# Altium PCB 21STM32Camera.PcbDoc
Units mil, origin at the board's own origin, x right, y up, seen from the top; angles counter-clockwise.
Board outline 2575 x 1930 mil, 2 copper layers (Top Layer, Bottom Layer); 18 components, 21 nets, 140 pads, 28 vias.
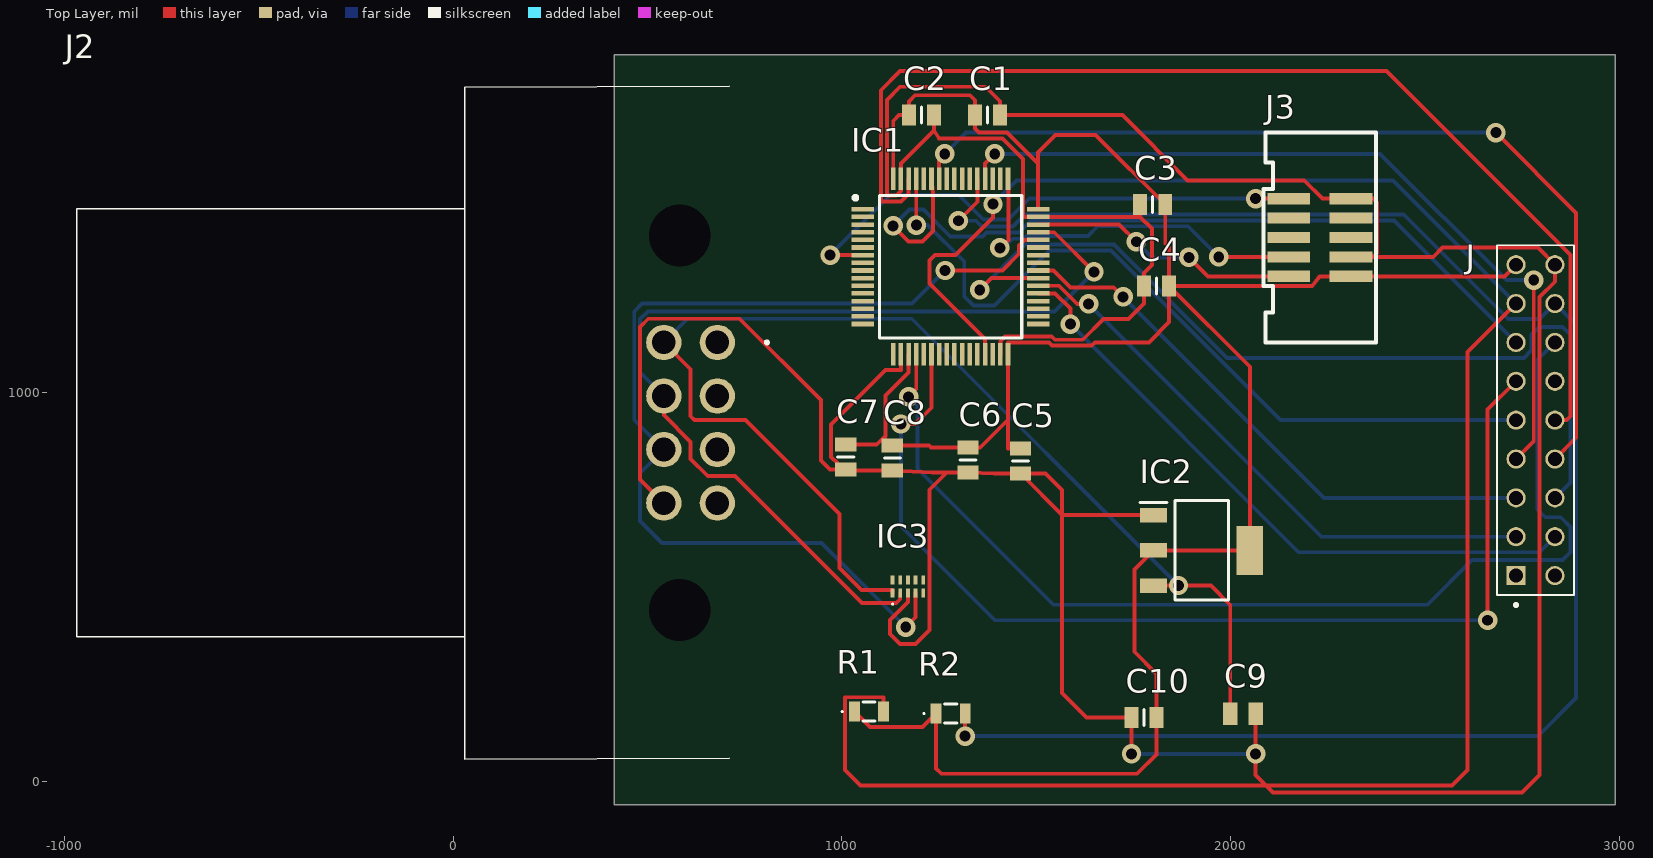
[diagram p0: Top Layer view]
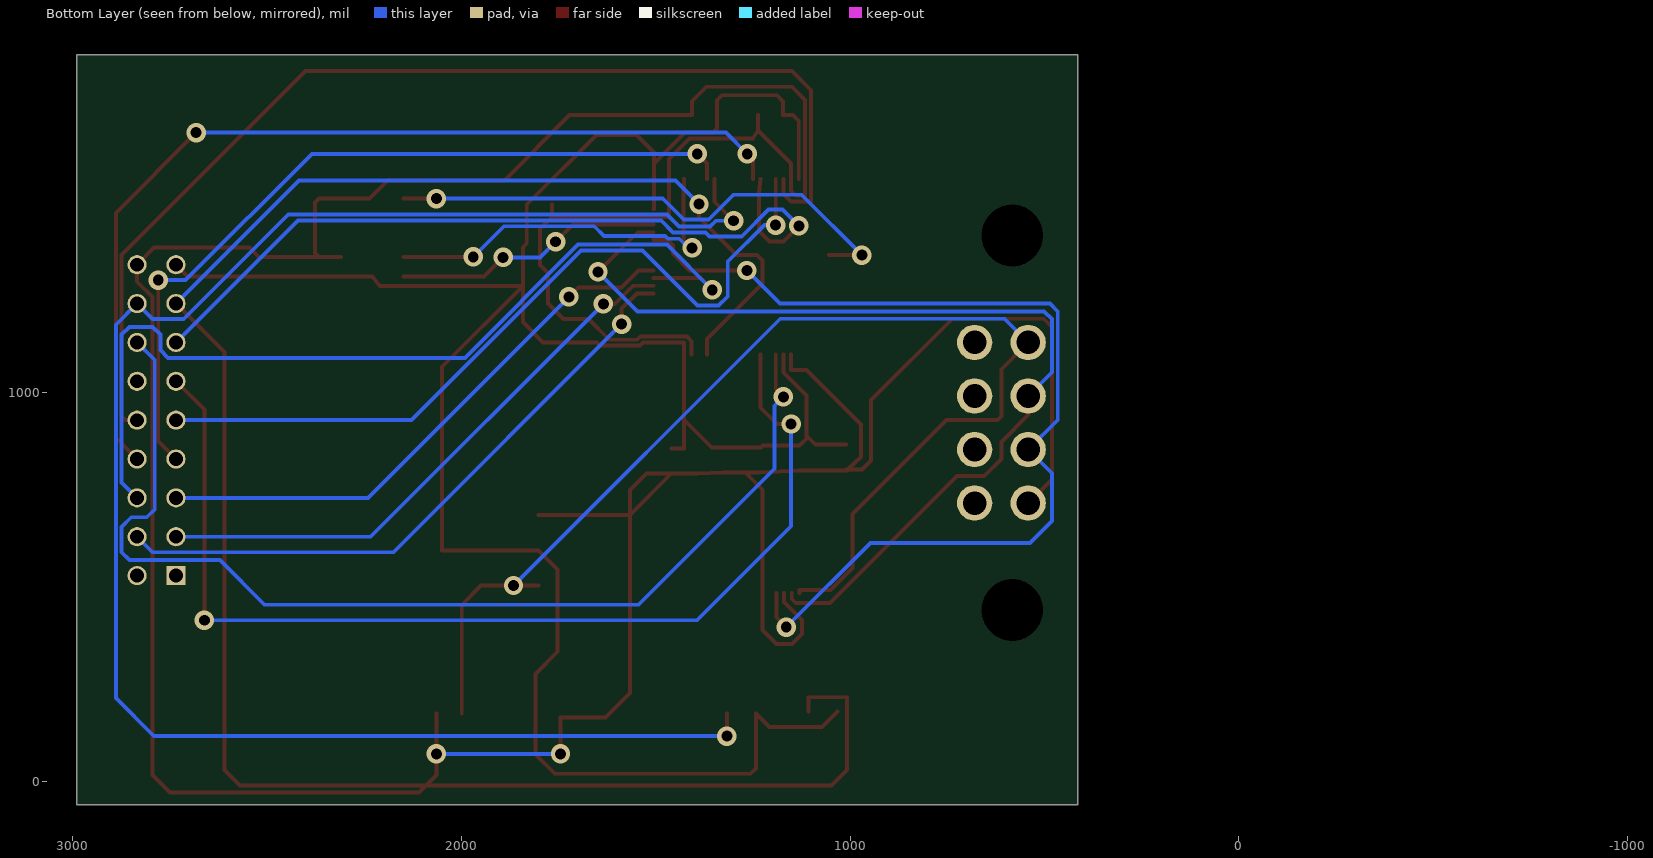
[diagram p1: Bottom Layer view, seen from below]

## Layer stack, top to bottom
Top Solder: solder mask 0.4, Solder Resist, Dk 3.5
Top Layer: signal copper 1.4
Dielectric 1: dielectric 12.6, FR-4, Dk 4.8
Bottom Layer: signal copper 1.4
Bottom Solder: solder mask 0.4, Solder Resist, Dk 3.5

## Board outline
415,-60 2990,-60 2990,1870 415,1870

## Design rules (kind name [scope] priority, off if disabled: settings)
Clearance [All] p1: gap=10 ignorepadtopadclearanceinfootprint=FALSE except(0: Arc-Hole Track-Hole SMDPad-Hole THPad-Hole Via-Hole Fill-Hole Poly-Hole Region-Hole Text-Hole; 5: Arc-Arc Arc-Track Arc-SMDPad Track-Track Track-SMDPad SMDPad-SMDPad)
PolygonConnect [All] p1: connectstyle=Relief reliefconductorwidth=10 reliefentries=4 polygonreliefangle="90 Angle" airgapwidth=10
RoutingVias [All] p1: holewidth=28 width=50 viastyle="Through Hole" minholewidth=28 minwidth=50 maxholewidth=28 maxwidth=50
SolderMaskExpansion [All] p1: expansion=4 istentingtop=FALSE
Width [All] p1: maxlimit=10 minlimit=10 preferedwidth=10
30 further rules are at their usual default settings.

## Components (designator, comment, footprint, x,y, rotation, side; value= is the part's Value field where it differs from the comment)
C1 "CL21B104KCFNNNE" CAPC2012X135N 1375,1715 r0 top
C2 "CL21B105KBFNNNE" CAPC2012X135N 1205,1715 r0 top
C3 "CL21B105KBFNNNE" CAPC2012X135N 1800,1485 r180 top
C4 "CL21B104KCFNNNE" CAPC2012X135N 1810,1275 r180 top
C5 "CL21B105KBFNNNE" CAPC2012X135N 1460,825 r270 top
C6 "CL21B104KCFNNNE" CAPC2012X135N 1325,827.28 r270 top
C7 "CL21B105KBFNNNE" CAPC2012X135N 1010,835 r270 top
C8 "CL21B104KCFNNNE" CAPC2012X135N 1130,832.28 r270 top
C9 "CL21A106KAYNNNE" CAPC2012X145N 2032.32,175 r0 top
C10 "CL21B104KCFNNNE" CAPC2012X135N 1777.72,165 r0 top
IC1 "STM32F446RCT6" QFP50P1200X1200X160-64N 1280,1325 r0 top
IC2 "LM1117MPX-3.3_NOPB" SOT230P700X180-4N 1925.98,595 r0 top
IC3 "PESD4USB5B-TBRX" PESD4USB5BTBRX 1170,501.73 r0 top
J "215309-9" TE_215309-9 2735,530 r90 top
J2 "34830-0801" 348300801 679.8,1130 r270 top
J3 "SHF-105-01-X-D-SM" SHF-105-01-X-D-SM 2230,1400 r90 top
R1 "0805W8F4701T5E" TNPV0805180KBEEA 1070,180 r0 top
R2 "0805W8F4701T5E" TNPV0805180KBEEA 1280,175 r0 top

## Footprints (in the part's own frame and the unit in brackets; to place one, negate y for a bottom-side part, rotate by r counter-clockwise, add the part's x,y. Pads: shape width x height; smd on the part's side, far side on the other; paste and mask are expansions set on the pad)
348300801 [mm]
  round 2.31 hole 1.54: 1(0,0) 2(3.5,0) 3(7,0) 4(10.5,0) 5(0,-3.5) 6(3.5,-3.5) 7(7,-3.5) 8(10.5,-3.5)
  round 2.025 hole 4.05 unplated: MH1(-7,-2.46) MH2(17.5,-2.46)
  silkscreen extent -16.75,-41.86 27.25,3.33, body extent -16.1,-41.56 26.59,1, height 25.37
CAPC2012X135N [mm]
  rect 0.91x1.39 smd: 1(-0.82,0) 2(0.82,0)
  silkscreen extent 0,-0.53 0,0.53, body extent -1,-0.63 1,0.63, height 1.35
CAPC2012X145N [mm]
  rect 0.97x1.47 smd: 1(-0.83,0) 2(0.83,0)
  body extent -1,-0.63 1,0.63, height 1.45
PESD4USB5BTBRX [mm]
  rect 0.25x0.6 smd: 1(-1,-0.425) 2(-0.5,-0.425) 3(0,-0.425) 4(0.5,-0.425) 5(1,-0.425) 6(1,0.425) 7(0.5,0.425) 8(0,0.425) 9(-0.5,0.425) 10(-1,0.425)
  silkscreen extent -1.05,-1.2 -0.95,-1.1, body extent -1.25,-0.5 1.25,0.5, height 0.9
QFP50P1200X1200X160-64N [mm]
  rect 1.475x0.3 smd: 1(-5.738,3.75) 2(-5.738,3.25) 3(-5.738,2.75) 4(-5.738,2.25) 5(-5.738,1.75) 6(-5.738,1.25) 7(-5.738,0.75) 8(-5.738,0.25) 9(-5.738,-0.25) 10(-5.738,-0.75) 11(-5.738,-1.25) 12(-5.738,-1.75) 13(-5.738,-2.25) 14(-5.738,-2.75) 15(-5.738,-3.25) 16(-5.738,-3.75) 33(5.738,-3.75) 34(5.738,-3.25) 35(5.738,-2.75) 36(5.738,-2.25) 37(5.738,-1.75) 38(5.738,-1.25) 39(5.738,-0.75) 40(5.738,-0.25) 41(5.738,0.25) 42(5.738,0.75) 43(5.738,1.25) 44(5.738,1.75) 45(5.738,2.25) 46(5.738,2.75) 47(5.738,3.25) 48(5.738,3.75)
  rect 0.3x1.475 smd: 17(-3.75,-5.738) 18(-3.25,-5.738) 19(-2.75,-5.738) 20(-2.25,-5.738) 21(-1.75,-5.738) 22(-1.25,-5.738) 23(-0.75,-5.738) 24(-0.25,-5.738) 25(0.25,-5.738) 26(0.75,-5.738) 27(1.25,-5.738) 28(1.75,-5.738) 29(2.25,-5.738) 30(2.75,-5.738) 31(3.25,-5.738) 32(3.75,-5.738) 49(3.75,5.738) 50(3.25,5.738) 51(2.75,5.738) 52(2.25,5.738) 53(1.75,5.738) 54(1.25,5.738) 55(0.75,5.738) 56(0.25,5.738) 57(-0.25,5.738) 58(-0.75,5.738) 59(-1.25,5.738) 60(-1.75,5.738) 61(-2.25,5.738) 62(-2.75,5.738) 63(-3.25,5.738) 64(-3.75,5.738)
  silkscreen extent -6.35,-4.65 4.65,4.65, body extent -6,-6 6,6, height 1.6
SHF-105-01-X-D-SM [mil]
  rect 29x110 smd mask+2: 1(-100,-80) 2(-100,80) 3(-50,-80) 4(-50,80) 5(0,-80) 6(0,80) 7(50,-80) 8(50,80) 9(100,-80) 10(100,80)
  silkscreen extent -270,-145 270,145
SOT230P700X180-4N [mm]
  rect 1.75x0.95 smd: 1(-3.15,2.3) 2(-3.15,0) 3(-3.15,-2.3)
  rect 1.75x3.2 smd: 4(3.15,0)
  silkscreen extent -4.02,-3.25 1.75,3.25, body extent -3.5,-3.25 3.5,3.25, height 1.68
TE_215309-9 [mm]
  rect 1.25x1.25 hole 0.9: 1(0,0)
  round 1.25 hole 0.9: 2(0,-2.54) 3(2.54,0) 4(2.54,-2.54) 5(5.08,0) 6(5.08,-2.54) 7(7.62,0) 8(7.62,-2.54) 9(10.16,0) 10(10.16,-2.54) 11(12.7,0) 12(12.7,-2.54) 13(15.24,0) 14(15.24,-2.54) 15(17.78,0) 16(17.78,-2.54) 17(20.32,0) 18(20.32,-2.54)
  silkscreen extent -2.02,-3.8 21.59,1.26
TNPV0805180KBEEA [mm]
  rect 0.7x1.3 smd: 1(-0.95,0) 2(0.95,0)
  silkscreen extent -1.8,-0.62 0.4,0.62, body extent -1,-0.63 1,0.63, height 0.55

## Part data
C1 C4 C6 C8 C10: "100uF", Manufacturer_Name="Samsung Electro-Mechanics", Mouser Part Number=187-CL21B104KCFNNNE, Arrow Part Number=CL21B104KCFNNNE, Arrow Price/Stock=https://www.arrow.com/en/products/cl21b104kcfnnne/samsung-electro-mechanics, Datasheet Link=https://datasheet.datasheetarchive.com/originals/distributors/DKDS-19/374389.pdf, Height=1.35mm, Manufacturer_Part_Number=CL21B104KCFNNNE, Mouser Price/Stock=https://www.mouser.co.uk/ProductDetail/Samsung-Electro-Mechanics/CL21B104KCFNNNE?qs=lptGheUA4EwiEGVRX9oguw%3D%3D
C2 C3 C5 C7: "1uF", Manufacturer_Name="Samsung Electro-Mechanics", Mouser Part Number=187-CL21B105KBFNNNE, Arrow Part Number=CL21B105KBFNNNE, Arrow Price/Stock=https://www.arrow.com/en/products/cl21b105kbfnnne/samsung-electro-mechanics?region=europe, Datasheet Link=https://componentsearchengine.com/Datasheets/2/CL21B105KBFNNNE.pdf, Height=1.35mm, Manufacturer_Part_Number=CL21B105KBFNNNE, Mouser Price/Stock=https://www.mouser.co.uk/ProductDetail/Samsung-Electro-Mechanics/CL21B105KBFNNNE?qs=yOVawPpwOwmddQEBPU6Y9A%3D%3D
C9: "10uF", Manufacturer_Name="Samsung Electro-Mechanics", Mouser Part Number=187-CL21A106KAYNNNE, Arrow Part Number=CL21A106KAYNNNE, Arrow Price/Stock=https://www.arrow.com/en/products/cl21a106kaynnne/samsung-electro-mechanics?region=nac, Datasheet Link=https://datasheet.datasheetarchive.com/originals/distributors/Datasheets_SAMA/6a45835c9b7400e9b49c55c38a8ff4a2.pdf, Height=1.45mm, Manufacturer_Part_Number=CL21A106KAYNNNE, Mouser Price/Stock=https://www.mouser.co.uk/ProductDetail/Samsung-Electro-Mechanics/CL21A106KAYNNNE?qs=yOVawPpwOwmTXAd4dJtNjA%3D%3D
IC1: "Integrated Circuit", Manufacturer_Name=STMicroelectronics, Mouser Part Number=511-STM32F446RCT6, Arrow Part Number=STM32F446RCT6, Arrow Price/Stock=https://www.arrow.com/en/products/stm32f446rct6/stmicroelectronics?region=nac, Datasheet Link=http://www.st.com/content/ccc/resource/technical/document/datasheet/65/cb/75/50/53/d6/48/24/DM00141306.pdf/files/DM00141306.pdf/jcr:content/translations/en.DM00141306.pdf, Height=1.6mm, Manufacturer_Part_Number=STM32F446RCT6, Mouser Price/Stock=https://www.mouser.co.uk/ProductDetail/STMicroelectronics/STM32F446RCT6?qs=Ok1pvOkw6%2FrlZ63GppV%2FkA%3D%3D
IC2: "Integrated Circuit", Arrow Part Number=LM1117MPX-3.3/NOPB, Manufacturer_Name="Texas Instruments", Mouser Part Number=926-LM1117MPX3.3NOPB, Arrow Price/Stock=https://www.arrow.com/en/products/lm1117mpx-3.3nopb/texas-instruments?region=nac, Datasheet Link=http://www.ti.com/lit/ds/symlink/lm1117.pdf, Height=1.8mm, Manufacturer_Part_Number=LM1117MPX-3.3/NOPB, Mouser Price/Stock=https://www.mouser.co.uk/ProductDetail/Texas-Instruments/LM1117MPX-3.3-NOPB?qs=X1J7HmVL2ZHRbBIxXi4utg%3D%3D
IC3: "Integrated Circuit", Manufacturer_Name=Nexperia, Mouser Part Number=771-PESD4USB5B-TBRX, Datasheet Link=https://assets.nexperia.com/documents/data-sheet/PESD4USB5B-TBS.pdf, Height=0.8mm, Manufacturer_Part_Number=PESD4USB5B-TBRX, Mouser Price/Stock=https://www.mouser.co.uk/ProductDetail/Nexperia/PESD4USB5B-TBRX?qs=MyNHzdoqoQL1Wz6R0ceOBw%3D%3D
J: "2X9P HV100 REC CON. TE, 8.5MM", Package=None, Availability=Unavailable, Centerline_Pitch="2.54 mm[.1 in]", EU_RoHS_Compliance=Compliant, MF="TE Connectivity", MP=215309-9, Number_of_Positions=9, Price=None, Product_Type=Connector, SnapEDA_Link=https://www.snapeda.com/parts/215309-9/TE%20Connectivity%20AMP%20Connectors/view-part/1389782/?ref=snap, TE_purchase_URL=https://www.te.com/usa-en/product-215309-9.html?te_bu=Cor&te_type=disp&te_campaign=seda_glo_cor-seda-global-disp-prtnr-fy19-seda-model-bom-cta_sma-317_1&elqCampaignId=32493
J2: "Connector", Manufacturer_Name=Molex, Mouser Part Number=538-34830-0801, Datasheet Link=https://www.mouser.com/datasheet/2/276/0348300801_PCB_HEADERS-693677.pdf, Height=25.88mm, Manufacturer_Part_Number=34830-0801, Mouser Price/Stock=https://www.mouser.co.uk/ProductDetail/Molex/34830-0801?qs=PdnAIJ6Mlf2HM0lerKt%252BjA%3D%3D
J3: "0.05\"X0.05\" SHROUDED TERMINAL STRIP, 10 PINS.", MANUFACTURER=SAMTEC, CREATED="February 17, 2015 - Wendy Xin", PCB DECAL=SHF-105-01-X-D-SM
R1 R2: library part TNPV0805180KBEEA, "4.7k", Manufacturer_Name=Vishay, Mouser Part Number=71-TNPV0805180KBEEA, Datasheet Link=https://www.vishay.com/docs/28881/tnpve3.pdf, Height=0.55mm, Manufacturer_Part_Number=TNPV0805180KBEEA, Mouser Price/Stock=https://www.mouser.co.uk/ProductDetail/Vishay/TNPV0805180KBEEA?qs=Li%252BoUPsLEnuke%2FRX4njE1w%3D%3D

## Via types
v1: diameter 50, hole 28, Top Layer to Bottom Layer, 28 vias

## Nets (pads, with @x,y where several pads share a name; then routed paths per layer and width w, separated by ;. In a path a pad name is that pad's centre, name@x,y a point inside that pad or via, vN(x,y) a via of type N, cw(c..) or ccw(c..) an arc to the next point about the centre after c; other vN are vias at no path point)
3.3V: C1.1 C2.1 C3.1 C4.1 C5.1 C6.1 C7.1 C8.1 C10.2 IC1.19 IC1.32 IC1.48 IC1.64 IC2.2 IC2.4 J3.1 J.17 R1.1 R2.1 | length 6488.9
  Top Layer w10: C7.1 1090,867.28 1108.64,885.93 ; R1.1 1072.6,140 1207.6,140 R2.1 1242.6,34 1256.6,20 1760,20 1810,70 C10.2 1810,277 1753,334 1753,546.03 IC2.2 IC2.4 2050,1067.28 C4.1 ; IC1.64 1132.36,1700 1147.36,1715 C2.1 1172.72,1750 1188.72,1766 1330,1766 1342.72,1753.28 C1.1 1342.72,1680 1352.72,1670 1425,1670 1505,1590 ; IC1.19 1171.73,1052.73 1112,993 1112,889.28 1108.64,885.93 ; C5.1 1427.64,857.28 1427.64,931 ; IC1.48 1505,1472.64 1505,1590 ; J.17 2705,1300 J3.1 2230,1300 2210,1275 C4.1 ; 1108.64,885.93 C8.1 1225,864.57 1230,859.57 C6.1 1356.21,859.57 1427.64,931 ; 1427.64,931 IC1.32 1427.64,1130 1533.1,1130 1541.1,1122 1643.1,1122 1651.1,1130 1790,1130 1842.28,1182.28 C4.1 ; 1505,1590 1505,1619 1550,1664 1653.28,1664 C3.1 1832.28,1385 1842.28,1375 C4.1
5V: C9.1 IC2.3 IC3.1 J2.5 | length 3144.3
  Top Layer w10: J2.5 611,1061 611,940 621.12,929.88 752.12,929.88 994,688 994,550 1051,493 1130.63,493 IC3.1 ; IC2.3 v1(1866.42,504.45) 1950,504.45 1999.64,454.8 C9.1
  Bottom Layer w10: J2.5 603,1191 1179.87,1191 v1(1866.42,504.45)
D0: IC1.37 J.4 | length 1645
  Top Layer w10: IC1.37 1549,1256.1 1588.1,1217 v1(1588.1,1177)
  Bottom Layer w10: v1(1588.1,1177) 2175.1,590 2795,590 J.4
D1: IC1.38 J.3 | length 1496.6
  Top Layer w10: IC1.38 1559,1275.79 1605.79,1229 v1(1635,1229)
  Bottom Layer w10: v1(1635,1229) 2234,630 J.3
D2: IC1.39 J.6 | length 2353.5
  Top Layer w10: v1(1355,1265) 1385.47,1295.47 IC1.39
  Bottom Layer w10: v1(1355,1265) 1471.67,1381.67 1700,1381.67 1991.67,1090 2755,1090 2775,1110 2775,1150 2795,1170 2854.61,1170 2874.61,1150 2874.61,769.61 J.6
D3: IC1.40 J.5 | length 1471.5
  Top Layer w10: IC1.40 1544.84,1315.16 1588.69,1271.31 1699.69,1271.31 v1(1724,1247)
  Bottom Layer w10: v1(1724,1247) 2241,730 J.5
D4: IC1.52 J.7 | length 2074.9
  Top Layer w10: IC1.52 1368.58,1590 v1(1393.58,1615) ; J.7 2780.39,875.39 v1(2780.39,1290.39)
  Bottom Layer w10: v1(1393.58,1615) 2385.39,1615 2710,1290.39 v1(2780.39,1290.39)
D5: IC1.58 J.8 | length 2459.1
  Top Layer w10: IC1.58 1250.47,1600.47 v1(1265,1615) ; v1(2683,1670) 2889.61,1463.39 2889.61,884.61 J.8
  Bottom Layer w10: v1(1265,1615) 1320,1670 v1(2683,1670)
D7: IC1.62 J.10 | length 2852.1
  Top Layer w10: IC1.62 1171.73,1512 1152.73,1493 1101,1493 1101,1779 1150,1828 2401.61,1828 2874.61,1355 2874.61,940 2864.61,930 J.10
D8: IC1.61 J.9 | length 2039.9
  Top Layer w10: IC1.61 1191.42,1432.58 v1(1192,1432)
  Bottom Layer w10: v1(1192,1432) 1221,1432 1315,1338 1315,1248.43 1338.43,1225 1393,1225 1534.67,1366.67 1692.33,1366.67 2129,930 J.9
D+: IC1.45 IC3.2 J2.6 | length 2530.1
  Top Layer w10: J2.6 542,943 611,874 611,830 655,786 725,786 1051.68,459.32 1140,459.32 1150.32,469.63 IC3.2 ; IC1.45 1546.73,1413.58 v1(1649,1311.31)
  Bottom Layer w10: J2.6 481,1053.2 481,1190 501,1210 1547.69,1210 v1(1649,1311.31)
D-: IC1.44 IC3.4 J2.7 | length 2620
  Top Layer w10: v1(1164.5,397.5) 1189.69,422.69 IC3.4 ; v1(1266,1315) 1413,1315 1456.26,1358.26 1456.26,1380.16 1470,1393.9 IC1.44
  Bottom Layer w10: v1(1164.5,397.5) 948,614 537,614 481,670 481,793.41 J2.7 466,930.41 466,1210 486,1230 1181,1230 v1(1266,1315)
GND: C1.2 C2.2 C3.2 C4.2 C5.2 C6.2 C7.2 C8.2 C9.2 C10.1 IC1.18 IC1.31 IC1.47 IC1.63 IC2.1 IC3.3 J2.8 J3.3 J3.9 J.18 | length 10792.5
  Top Layer w10: J2.8 481,777.61 481,1170 502,1191 737,1191 946.28,981.72 946.28,826.43 970,802.72 C7.2@1007.05,802.72 ; C7.2@1007,800 C7.2@1010,800 ; IC1.18 1152.05,1059.05 1112.05,1059.05 972,919 972,835 C7.2@1007.05,802.72 ; IC3.3 1170,462 1124,416 1124,380 1150,354 1190,354 1226,390 1226,751 1270,795 ; C2.2 1237.28,1675.24 ; IC1.31 1407.95,1132.95 1420,1145 1540.1,1145 1548.1,1137 1620.1,1137 1673.1,1190 1737.72,1190 1777.72,1230 C4.2 1777.72,1309 1798,1329.28 1798,1422.72 1767.72,1453 ; v1(1745.43,71) C10.1 1630,165 1567,228 1567,686.28 ; C3.2 1767.72,1453 ; IC2.1 1567.73,685.55 1567,686.28 ; C9.2 v1(2065,71) 2065,16.39 2110,-28.61 2750,-28.61 2795.39,16.78 2795.39,1246.41 2835,1286.01 J.18 2791,1374 2546,1374 2522,1350 2367,1350 ; J3.3 2367,1350 ; C7.2@1007.05,802.72 C7.2 C7.2@1010,800 ; C7.2@1007.05,802.72 1008.65,801.25 C7.2@1010,800 ; C7.2@1010,800 C8.2 1233,795 1270,795 ; 1237.28,1675.24 1250,1655 1413,1655 1466,1602 1466,1452.95 IC1.47 1767.67,1452.95 1767.72,1453 ; 1237.28,1675.24 1152.05,1590 IC1.63 1152.05,1520 1140.05,1508 1116,1508 1116,1754 1150,1788 1370,1788 1407.28,1750.72 C1.2 1722,1715 1890,1547 2190,1547 2237,1500 J3.9 2367,1500 2377,1490 2377,1360 2367,1350 ; 1270,795 C6.2 1393.28,792.72 C5.2 C5.2@1460.57,792.72 ; C5.2@1460.57,792.72 1524.28,792.72 1567,750 1567,686.28 ; C5.2@1460.57,792.72 1567,686.28
  Bottom Layer w10: v1(1745.43,71) v1(2065,71)
HSYNC: IC1.20 J.14 | length 2809.6
  Top Layer w10: v1(1172,990) 1191.42,1009.42 IC1.20
  Bottom Layer w10: v1(1172,990) 1195,967 1195,805 1545,455 2507.13,455 2622.13,570 2854.61,570 2874.61,590 2874.61,655.39 2850,680 2810,680 2789.61,700.39 2789.61,1084.61 J.14
I2C2_SCL: IC1.29 J.15 R1.2 | length 5257.4
  Top Layer w10: R1.2 1107.4,217 1008,217 1008,30 1048,-10 2570,-10 2610,30 2610,1105 J.15 ; IC1.29 1368.58,1139 1226,1281.58 1226,1341 1240,1355 1293,1355 1389,1451 v1(1389,1486)
  Bottom Layer w10: v1(1389,1486) 1450,1547 2418,1547 J.15
I2C2_SDA: IC1.53 J.16 R2.2 | length 4518.6
  Top Layer w10: v1(1300,1443) 1348.9,1491.9 IC1.53 ; v1(1317.4,117) R2.2
  Bottom Layer w10: v1(1300,1443) 1345.79,1443 1360.5,1428.28 1440.52,1428.28 1471.23,1459 2446,1459 2715,1190 2795,1190 J.16 2889.61,1175.39 2889.61,214.61 2792,117 v1(1317.4,117)
NRST: IC1.7 J3.10 | length 1377.4
  Top Layer w10: v1(970,1354.53) IC1.7 ; v1(2065,1500) J3.10
  Bottom Layer w10: v1(970,1354.53) 1125.47,1510 1300,1510 1364,1446 1428.23,1446 1482.23,1500 v1(2065,1500)
PCLK: IC1.22 J.11 | length 2751.8
  Top Layer w10: v1(1152,920) 1188.79,920 1230.79,962 IC1.22 ; v1(2662,415) 2662,957 J.11
  Bottom Layer w10: v1(1152,920) 1152,657 1394,415 v1(2662,415)
SWCLK: IC1.49 J3.4 | length 988.8
  Top Layer w10: v1(1406.72,1373.28) 1409.28,1373.28 1429,1393 1429,1526.31 1427.64,1526.31 IC1.49 ; v1(1970,1350) J3.4
  Bottom Layer w10: v1(1406.72,1373.28) 1416.51,1373.28 1439.9,1396.67 1468.9,1396.67 1476.23,1404 1633.5,1404 1658.5,1429 1891,1429 v1(1970,1350)
SWDIO: IC1.46 J3.2 | length 699.3
  Top Layer w10: IC1.46 1713.73,1433.27 v1(1758,1389) ; v1(1893,1349) 1942,1300 J3.2
  Bottom Layer w10: v1(1758,1389) 1798,1349 v1(1893,1349)
VSYNC: IC1.59 J.13 | length 2060.9
  Top Layer w10: v1(1132,1430) 1172,1390 1208,1390 1235,1417 1235,1514 IC1.59
  Bottom Layer w10: v1(1132,1430) 1174,1472 1210,1472 1279,1403 1362.12,1403 1372.4,1413.28 1455.52,1413.28 1486.23,1444 2421,1444 J.13
pads on no net: IC1.1 IC1.2 IC1.3 IC1.4 IC1.5 IC1.6 IC1.8 IC1.9 IC1.10 IC1.11 IC1.12 IC1.13 IC1.14 IC1.15 IC1.16 IC1.17 IC1.21 IC1.23 IC1.24 IC1.25 IC1.26 IC1.27 IC1.28 IC1.30 IC1.33 IC1.34 IC1.35 IC1.36 IC1.41 IC1.42 IC1.43 IC1.50 IC1.51 IC1.54 IC1.55 IC1.56 IC1.57 IC1.60 IC3.5 IC3.6 IC3.7 IC3.8 IC3.9 IC3.10 J2.1 J2.2 J2.3 J2.4 J2.MH1 J2.MH2 J3.5 J3.6 J3.7 J3.8 J.1 J.2 J.12

## Text inside footprints (layer, text, board x,y; h text height)
J3: Mechanical 1 "J1" at 2250,1380.43 h30 r90